# Allegro board stm32f103c8t6.brd
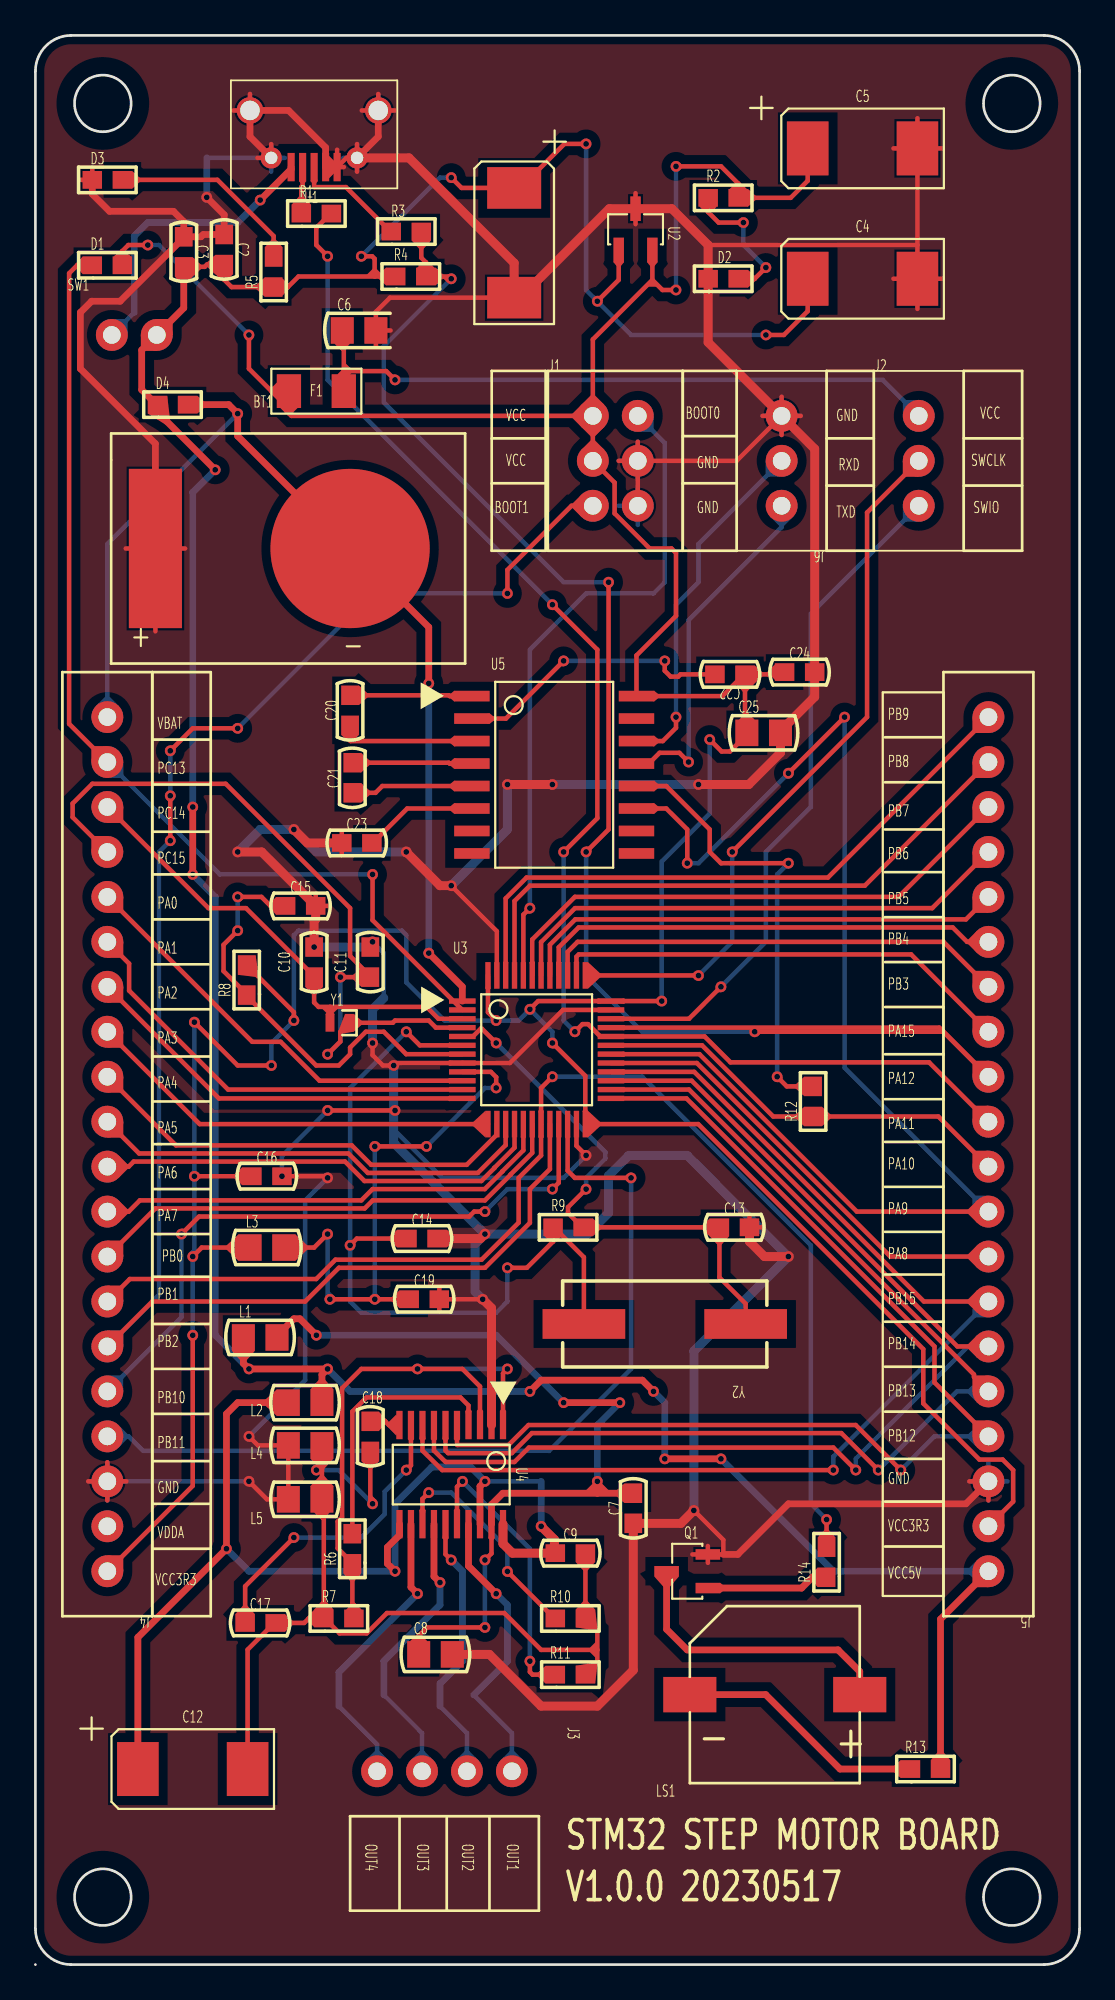
[diagram p0: board, top side]
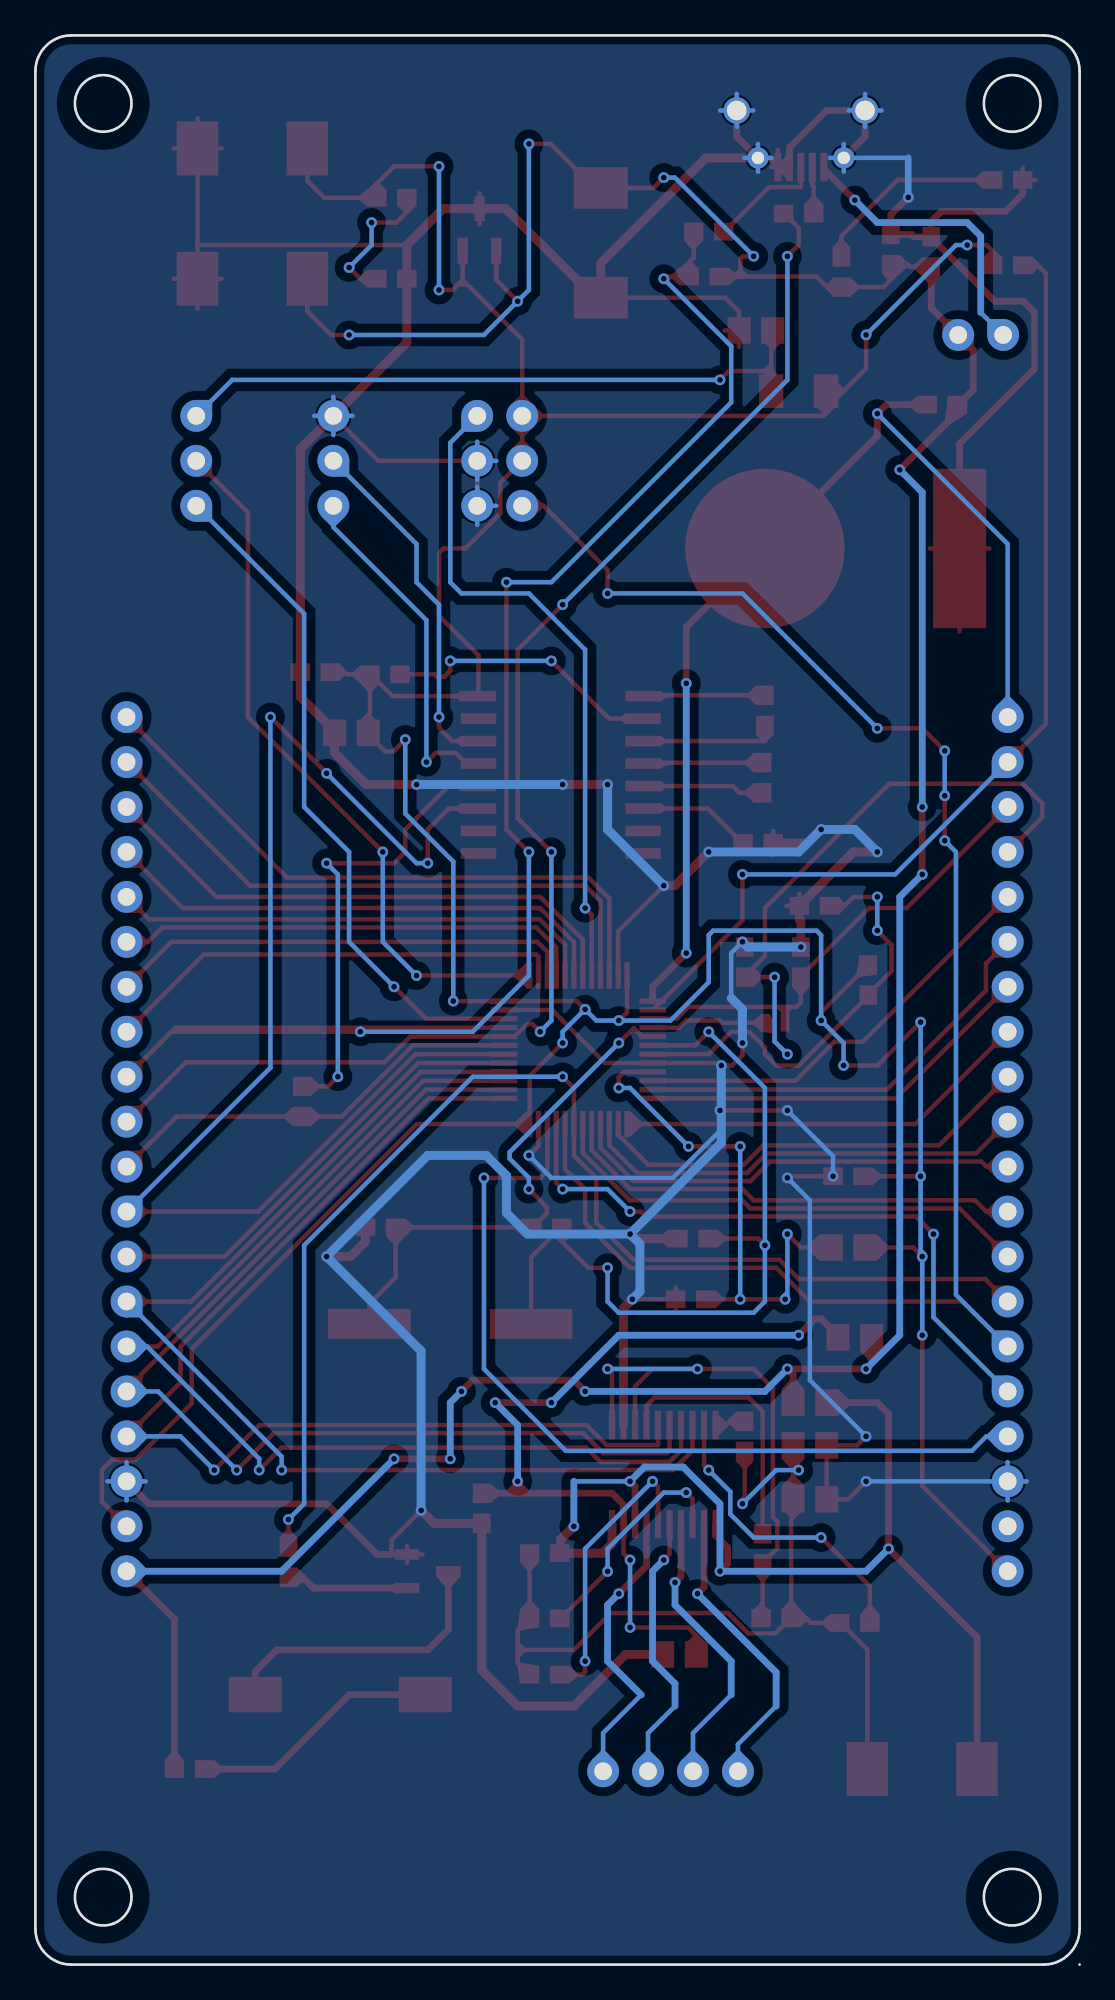
[diagram p1: board, bottom side, seen from below]

Outline 59 x 109 mm; copper layers: TOP, BOTTOM. Coordinates in mm from the lower left corner of the outline.
Outline path: circle c3.81,105.16 r1.6 ; circle c3.81,3.81 r1.6 ; circle c55.17,105.16 r1.6 ; circle c55.17,3.81 r1.6 ; 0,106.97 arc(0.6,108.4) 2.03,109 56.97,109 arc(58.4,108.4) 59,106.97 59,2.03 arc(58.4,0.6) 56.97,0 2.03,0 arc(0.6,0.6) 0,2.03 0,106.97

## Placement (name value [footprint] x y rotation side)
BT1  3.6V  [BAT_9]  17.78 80.01 0 top
C1  100uf/16V  [C7343]  27.05 97.28 270 top
C2  0.1uf/16V  [C0603]  10.67 96.9 270 top
C3  0.1uf/16V  [C0603]  8.38 96.77 270 top
C4  10uf/16V  [C7343]  46.74 95.25 0 top
C5  10uf/16V  [C7343]  46.74 102.62 0 top
C6  10uf/16V  [C0805]  18.29 92.33 0 top
C7  0.1uf/16V  [C0603]  33.78 25.78 90 top
C8  10uf/16V  [C0805]  22.61 17.53 0 top
C9  0.1uf/16V  [C0603]  30.23 23.25 0 top
C10  20pF  [C0603]  15.75 56.64 90 top
C11  20pF  [C0603]  18.92 56.64 90 top
C12  100uf/16V  [C7343]  8.89 11.05 0 top
C13  20pF  [C0603]  39.5 41.66 0 top
C14  20pF  [C0603]  21.84 41.02 0 top
C15  1uf/16V  [C0603]  14.99 59.82 0 top
C16  0.1uf/16V  [C0603]  13.08 44.54 0 top
C17  0.1uf/16V  [C0603]  12.7 19.3 0 top
C18  0.1uf/16V  [C0603]  18.92 29.84 270 top
C19  0.1uf/16V  [C0603]  21.97 37.59 0 top
C20  0.1uf/16V  [C0603]  17.78 70.87 90 top
C21  0.1uf/16V  [C0603]  17.91 67.06 90 top
C22  0.1uf/16V  [C0603]  39.24 72.9 180 top
C23  0.1uf/16V  [C0603]  18.16 63.37 0 top
C24  0.1uf/16V  [C0603]  43.18 73.03 0 top
C25  10uf/16V  [C0805]  41.15 69.6 0 top
D1  SSL-LX4673  [L0603]  4.06 96.01 0 top
D2  SSL-LX4673  [L0603]  38.86 95.25 0 top
D3  SSL-LX4673  [L0603]  4.06 100.84 0 top
D4  IN4148  [L0603]  7.75 88.14 0 top
F1  FUSE  [F1206]  15.88 88.9 0 top
J1  CON6A  [CON2R0_2X3]  34.04 84.96 0 top
J2  CON3  [CON2R0_3P]  49.91 84.96 0 top
J3  CON4  [CON2R0_4P]  21.84 10.92 270 top
J4  HEADER 20  [CON2R0_20P]  4.06 22.23 180 top
J5  HEADER 20  [CON2R0_20P_0]  53.85 22.23 180 top
J6  CON3  [CON2R0_3P]  42.16 84.96 180 top
L1  10@100MHZ  [L0805]  12.7 35.43 0 top
L2  10@100MHZ  [L0805]  15.24 31.75 0 top
L3  2.2uH  [L0805]  13.08 40.51 0 top
L4  10@100MHZ  [L0805]  15.24 29.34 0 top
L5  10@100MHZ  [L0805]  15.24 26.29 0 top
LS1  BEEP  [SPEAKER_3MM]  41.78 15.25 0 top
Q1  2N2222  [SOT23-3]  36.83 22.23 0 top
R1  20  [R0603]  15.88 98.93 0 top
R2  51  [R0603]  38.86 99.82 0 top
R3  20  [R0603]  20.96 97.92 0 top
R4  4.7k  [R0603]  21.21 95.38 0 top
R5  20  [R0603]  13.46 95.63 90 top
R6  1k  [R0603]  17.91 23.5 90 top
R7  1k  [R0603]  17.15 19.56 0 top
R8  10K  [R0603]  11.94 55.63 90 top
R9  1M  [R0603]  30.1 41.66 0 top
R10  1  [R0603]  30.23 19.56 0 top
R11  1  [R0603]  30.23 16.38 0 top
R12  0  [R0603]  43.94 48.77 90 top
R13  100  [R0603]  50.29 11.05 0 top
R14  1k  [R0603]  44.7 22.73 90 top
SW1  SW MAG-SPST/SM  [SW]  4.32 92.08 0 top
U1  USB_mrico  [MICRO_5PIN]  15.75 103.76 0 top
U2  AMS1117-3_3  [SOT23-3]  33.91 98.04 270 top
U3  STM32F103C8T6  [LQFP48]  28.32 51.69 0 top
U4  LB1940T  [TSSOP20]  23.5 27.69 270 top
U5  MAX3232  [SOP16]  29.31 67.22 0 top
Y1  32.768Khz  [YSX1610]  17.15 53.21 0 top
Y2  8Mhz  [HC-49SMD]  35.56 36.2 180 top

## Library data of the parts
BT1 = BATTERY
C1 C4 C5 C12 = CAP POL
C2 C3 C6-C11 C13-C25 = CAP NP
D1-D3 = SSL-LX4673_1
D4 = BAS21/SOT_0
F1 = FUSE
J1 = CON6A
J2 J6 = CON3
J3 = CON4
J4 J5 = HEADER 20
L1-L5 = INDUCTOR
LS1 = SPEAKER
Q1 = 2N2222_0
R1-R14 = R
SW1 = SW MAG-SPST/SM
U1 = USB_mrico_1
U2 = AMS1117-3_3
U3 = STM32F103C8T6
U4 = LB1940T
U5 = MAX3232
Y1 Y2 = ZTB

## Footprints (pads in the part's own frame, mm; a bottom-side part is the same pattern mirrored in y, then rotated)
BAT_9
  round 9 smd: 1(0,0)
  rect 3x9 smd: 2(-11,0)
C0603
  rect 1.1x1 smd: 1(-0.85,0) 2(0.85,0)
C0805
  rect 1.3x1.5 smd: 1(-0.95,0) 2(0.95,0)
C7343
  rect 2.35x3.05 smd: 1(-3.1,0) 2(3.1,0)
CON2R0_2X3
  round 1.8 hole 1: 1(-2.54,2.54) 2(-2.54,0) 3(-2.54,-2.54) 4(0,2.54) 5(0,0) 6(0,-2.54)
CON2R0_3P
  round 1.8 hole 1: 1(0,2.54) 2(0,0) 3(0,-2.54)
CON2R0_4P
  round 1.8 hole 1: 1(0,5.08) 2(0,2.54) 3(0,0) 4(0,-2.54)
CON2R0_20P
  round 1.8 hole 1: 1(0,0) 2(0,-2.54) 3(0,-5.08) 4(0,-7.62) 5(0,-10.16) 6(0,-12.7) 7(0,-15.24) 8(0,-17.78) 9(0,-20.32) 10(0,-22.86) 11(0,-25.4) 12(0,-27.94) 13(0,-30.48) 14(0,-33.02) 15(0,-35.56) 16(0,-38.1) 17(0,-40.64) 18(0,-43.18) 19(0,-45.72) 20(0,-48.26)
CON2R0_20P_0
  round 1.8 hole 1: 1(0,0) 2(0,-2.54) 3(0,-5.08) 4(0,-7.62) 5(0,-10.16) 6(0,-12.7) 7(0,-15.24) 8(0,-17.78) 9(0,-20.32) 10(0,-22.86) 11(0,-25.4) 12(0,-27.94) 13(0,-30.48) 14(0,-33.02) 15(0,-35.56) 16(0,-38.1) 17(0,-40.64) 18(0,-43.18) 19(0,-45.72) 20(0,-48.26)
F1206
  rect 1.372x1.905 smd: 1(-1.55,0) 2(1.55,0)
HC-49SMD
  rect 4.67x1.68 smd: 1(-4.57,0) 2(4.57,0)
L0603
  rect 1.1x1 smd: 1(-0.85,0) 2(0.85,0)
L0805
  rect 1.3x1.5 smd: 1(-0.95,0) 2(0.95,0)
LQFP48
  rect 1.5x0.3 smd: 1(-4.2,2.75) 2(-4.2,2.25) 3(-4.2,1.75) 4(-4.2,1.25) 5(-4.2,0.75) 6(-4.2,0.25) 7(-4.2,-0.25) 8(-4.2,-0.75) 9(-4.2,-1.25) 10(-4.2,-1.75) 11(-4.2,-2.25) 12(-4.2,-2.75) 25(4.2,-2.75) 26(4.2,-2.25) 27(4.2,-1.75) 28(4.2,-1.25) 29(4.2,-0.75) 30(4.2,-0.25) 31(4.2,0.25) 32(4.2,0.75) 33(4.2,1.25) 34(4.2,1.75) 35(4.2,2.25) 36(4.2,2.75)
  rect 0.3x1.5 smd: 13(-2.75,-4.2) 14(-2.25,-4.2) 15(-1.75,-4.2) 16(-1.25,-4.2) 17(-0.75,-4.2) 18(-0.25,-4.2) 19(0.25,-4.2) 20(0.75,-4.2) 21(1.25,-4.2) 22(1.75,-4.2) 23(2.25,-4.2) 24(2.75,-4.2) 37(2.75,4.2) 38(2.25,4.2) 39(1.75,4.2) 40(1.25,4.2) 41(0.75,4.2) 42(0.25,4.2) 43(-0.25,4.2) 44(-0.75,4.2) 45(-1.25,4.2) 46(-1.75,4.2) 47(-2.25,4.2) 48(-2.75,4.2)
MICRO_5PIN
  rect 0.4x1.6 smd: 1(-1.3,-2.2) 2(-0.65,-2.2) 3(0,-2.2) 4(0.65,-2.2) 5(1.3,-2.2)
  round 1.2 hole 0.7: 6(-2.425,-1.68) 7(2.425,-1.68)
  round 1.5 hole 1.1: 8(-3.625,1) 9(3.625,1)
R0603
  rect 1.1x1 smd: 1(-0.85,0) 2(0.85,0)
SOP16
  rect 2x0.6 smd: 1(-4.65,4.445) 2(-4.65,3.175) 3(-4.65,1.905) 4(-4.65,0.635) 5(-4.65,-0.635) 6(-4.65,-1.905) 7(-4.65,-3.175) 8(-4.65,-4.445) 9(4.65,-4.445) 10(4.65,-3.175) 11(4.65,-1.905) 12(4.65,-0.635) 13(4.65,0.635) 14(4.65,1.905) 15(4.65,3.175) 16(4.65,4.445)
SOT23-3
  rect 1.39x0.59 smd: 1(1.165,-0.95) 2(1.165,0.95) 3(-1.165,0)
SPEAKER_3MM
  rect 3x2 smd: 1(-4.8,0) 2(4.8,0)
SW
  round 1.8 hole 1: 1(0,0) 2(2.54,0)
TSSOP20
  rect 1.6x0.35 smd: 1(-2.8,2.925) 2(-2.8,2.275) 3(-2.8,1.625) 4(-2.8,0.975) 5(-2.8,0.325) 6(-2.8,-0.325) 7(-2.8,-0.975) 8(-2.8,-1.625) 9(-2.8,-2.275) 10(-2.8,-2.925) 11(2.8,-2.925) 12(2.8,-2.275) 13(2.8,-1.625) 14(2.8,-0.975) 15(2.8,-0.325) 16(2.8,0.325) 17(2.8,0.975) 18(2.8,1.625) 19(2.8,2.275) 20(2.8,2.925)
YSX1610
  rect 0.5x1 smd: 1(-0.5,0) 2(0.6,0)

## Nets
GND: U5.15
GND_EARTH: C9.2 C12.2 C17.2 C18.2 L4.2 L5.2 R7.1 R10.2 R11.2
GND_POWER: BT1.2(-) C1.2 C2.1 C3.1 C4.2 C5.2 C6.2 C7.1 C8.2 C10.2 C11.2 C13.2 C14.2 C15.2 C16.2 C19.2 C23.1 C24.2 C25.2 D2.1(CATHODE) D3.1(CATHODE) J1.5 J1.6 J4.3 J5.3 J6.3 L4.1 L5.1 Q1.2(EMITTER) U1.4(ID) U1.5(G#5) U1.6(G#6) U1.7(G#7) U1.8(G#8) U1.9(G#9) U2.3(GND) U3.8(VSSA) U3.23(VSS_1) U3.35(GND) U3.47(VSS_3) U4.2(S-GND)
VBAT: BT1.1(+) D4.2(CATHODE) J4.20 U3.1(VBAT)
VCC3R3: C5.1 C16.1 C22.1 C24.1 C25.1 D1.2(ANODE) F1.1 J1.1 J1.2 J4.1 J5.2 L3.1 R2.2 R8.2 U2.2(OUT) U3.24(VDD_1) U3.36(VAA3V3) U3.48(VDD_3) U5.16(VCC)
VCC5V: C1.1 C2.2 C3.2 C4.1 D4.1(ANODE) J5.1 L1.1 L2.2 R4.1 R5.1 R13.2 SW1.2 U2.1(IN)
VDDA: J4.2
BOOT0: J1.4 U3.44(BOOT0)
PA0: J4.16 U3.10(PA0)
PA1: J4.15 U3.11(PA1)
PA2: J4.14 U3.12(PA2)
PA3: J4.13 U3.13(PA3)
PA4: J4.12 U3.14(PA4)
PA5: J4.11 U3.15(PA5)
PA6: J4.10 U3.16(PA6)
PA7: J4.9 U3.17(PA7)
PA8: J5.8 U3.29(PA8)
PA9/TXD1: J5.9 U3.30(PA9) U5.11(T1IN)
PA10/RXD1: J5.10 R12.1 U3.31(PA10)
PA11: J5.11 R1.2 U3.32(PA11)
PA12: J5.12 R3.2 R4.2 U3.33(PA12)
PA15: J5.13 U3.38(PA15)
PB0: J4.8 U3.18(PB0)
PB1: J4.7 R14.2 U3.19(PB1)
PB2/BOOT1: J1.3 J4.6 U3.20(PB2/BOOT1)
PB3: J5.14 U3.39(PB3)
PB4: J5.15 U3.40(PB4)
PB5: J5.16 U3.41(PB5)
PB6: J5.17 U3.42(PB6)
PB7: J5.18 U3.43(PB7)
PB8: J5.19 U3.45(PB8)
PB9: J5.20 U3.46(PB9)
PB10: J4.5 U3.21(PB10)
PB11: J4.4 U3.22(PB11)
PB12: J5.4 U3.25(PB12) U4.5(ENA1)
PB13: J5.5 U3.26(PB13) U4.6(ENA2)
PB14: J5.6 U3.27(PB14) U4.7(IN1)
PB15: J5.7 U3.28(PB15) U4.8(IN2)
PC13: D1.1(CATHODE) J4.19 U3.2(PC13)
PC14: C10.1 J4.18 U3.3(PC14) Y1.1
PC15: C11.1 J4.17 U3.4(PC15) Y1.2
REST: C15.1 R8.1 U3.7(NRST)
RXD: J6.2 U5.14(T1OUT)
SWCLK: J2.2 U3.37(SWCLK)
SWIO: J2.3 U3.34(SWIO)
TXD: J6.1 U5.13(R1IN)
N00977: R1.1 U1.2(D-)
N00983: R3.1 U1.3(D+)
N01151: D3.2(ANODE) R5.2
N04687: C19.1 L3.2 U3.9(VDDA)
N06253: C6.1 F1.2 J2.1
N07032: C13.1 R9.2 U3.5(OSCIN) Y2.1
N07083: C14.1 R9.1 U3.6(OSCOUT) Y2.2
N14166: C9.1 C12.1 L2.1 U4.11(VS2) U4.18(VDD) U4.20(VS1)
N14239: J3.1 U4.17(OUT1)
N14243: J3.2 U4.15(OUT2)
N14247: J3.3 U4.14(OUT3)
N14326: J3.4 U4.12(OUT4)
N14397: C18.1 U4.10(FC2)
N14420: C17.1 U4.9(FC1)
N14539: R6.1 R7.2 U4.1(VC1) U4.3(VC2)
N14589: R6.2 U4.4(VREF)
N14845: R10.1 U4.13(RFG2)
N14868: R11.1 U4.16(RFG1)
N14949: C7.2 C8.1 L1.2 U4.19(SVDD)
N18940: C23.2 U5.6(V-)
N18980: C22.2 U5.2(V+)
N19411: C21.1 U5.5(C2-)
N19425: C21.2 U5.4(C2+)
N19434: C20.1 U5.3(C1-)
N19446: C20.2 U5.1(C1+)
N19567: R12.2 U5.12(R1OUT)
N21162: LS1.2 Q1.3(COLLECTOR)
N39447: LS1.1 R13.1
N40672: SW1.1 U1.1(BBUS)
N207372: Q1.1(BASE) R14.1
N695410: D2.2(ANODE) R2.1

Pads without a net: U5 7 8 9 10

## Via types
v1: diameter 0.61, hole 0.33, TOP to BOTTOM, 135 vias

## Routing (per net, layer and track width the routed paths; a pad name or vN(x,y) marks a point on that pad's centre or on a via; arc(x,y) is an arc through that point)
GND_EARTH: length 53.5
  TOP w0.254: R11.2 31.75,17.06 31.75,17.78 ; C18.2 18.92,26.16 v1(19.05,26.04) ; 16.19,27.94 L5.2 16.19,25.28 16.3,25.18 R7.1 ; 16.19,27.94 v1(15.88,27.94) ; 16.19,27.94 L4.2 ; 31.75,17.78 31.75,18.88 R10.2 C9.2 ; 31.75,17.78 28.58,17.78 26.49,19.86 19.86,19.86 18.71,18.71 17.19,18.71 16.35,19.56 R7.1 ; R7.1 15.44,19.56 15.19,19.3 C17.2 13.5,19.3 11.99,17.79 C12.2
  BOTTOM w0.254: v1(19.05,26.04) 17.15,27.94 v1(15.88,27.94)
GND_POWER: length 494.6
  TOP w0.254: v1(12.07,27.3) 13.08,26.29 L5.1 L4.1 12.57,29.34 v1(12.07,29.84) ; 48.48,102.62 C5.2 ; C5.2 51.19,102.62 ; C5.2 49.84,97.16 ; C5.2 49.84,104.32 ; 2.49,100.84 D3.1 3.21,101.52 ; U1.5 17.43,101.56 ; U1.5 17.05,102.54 ; U1.5 17.57,102.08 U1.7 ; U1.5 U1.4 ; 12.12,105.69 U1.8 11.2,104.76 ; U1.9 20.3,104.76 ; U1.9 18.45,104.76 ; U1.9 19.37,105.69 ; 2.99,27.3 J4.3 ; J4.3 4.06,26.23 ; J4.3 5.14,27.3 ; J4.3 4.06,28.38 ; v1(16.51,48.26) v1(20.32,48.26) ; J1.5 39.62,84.96 J6.3 ; J1.5 34.04,86.04 ; J1.5 32.96,84.96 ; J1.5 34.04,82.42 ; v1(16.51,44.45) 16.42,44.54 v1(13.93,44.54) ; U3.35 29.81,53.94 26.81,50.94 U3.8 20.38,50.94 v1(20.24,50.8) 19.63,50.8 19.05,51.38 v1(19.05,52.07) ; 53.85,26.23 J5.3 52.77,27.3 ; BT1.2 8.46,80.01 ; BT1.2 5.1,80.01 ; BT1.2 6.78,75.33 ; 13.32,102.86 U1.6 12.55,102.08 ; C6.2 20.07,92.33 ; C6.2 19.24,91.4 ; C6.2 19.24,93.38 20.04,94.18 C1.2 ; J6.3 41.09,87.5 ; J6.3 42.16,88.58 ; J6.3 43.24,87.5 ; J6.3 42.16,86.42 ; C4.2 51.19,95.25 ; C4.2 49.84,97.16 ; C4.2 49.84,93.55 ; C4.2 48.48,95.25 ; 17.31,62.69 C23.1 17.31,64.05 ; 16.56,59.82 C15.2 15.84,60.5 ; 41.08,41.66 C13.2 40.35,42.33 ; v1(31.12,45.72) 30.57,46.26 U3.23 ; U1.7 18.17,102.86 ; U1.7 18.17,101.3 ; 49.84,97.16 38.01,97.16 ; 37.12,23.17 Q1.2 ; Q1.2 38.87,23.17 38.87,24 v1(37.2,25.66) ; Q1.2 38,22.7 ; Q1.2 38,23.65 ; U3.47 26.07,58.38 v1(23.5,60.96) ; 33.91,98.34 U2.3 33.91,100.08 ; 22.82,36.91 C19.2 ; C19.2 v1(25.27,37.59) ; C19.2 22.82,38.27
  TOP w0.381: 38.87,23.17 39.69,23.17 42.55,26.04 52.58,26.04 J5.3 ; U1.7 19.37,103.28 U1.9 ; D3.1 3.21,100.03 4.19,99.06 7.8,99.06 8.38,98.48 C3.1 ; C3.1 8.38,97.57 4.79,93.98 3.18,93.98 2.54,93.34 2.54,90.17 6.78,85.93 BT1.2 ; C3.1 9.36,97.62 9.49,97.75 C2.1 10.67,98.86 v1(9.68,99.85) ; U1.6 12.12,103.28 U1.8 14.3,104.76 16.4,102.66 U1.4
  TOP w0.508: v1(37.2,25.66) 36.47,24.93 C7.1 33.78,16.64 31.75,14.61 28.58,14.61 25.65,17.53 C8.2 ; v1(11.43,62.87) 12.79,62.87 C15.2 15.84,59.06 15.75,58.97 v1(15.75,57.49) ; v1(37.47,66.67) 40.31,66.67 42.1,68.46 C25.2 42.1,69.7 44.03,71.63 C24.2 44.03,85.64 J6.3 38.01,91.65 D2.1 38.01,97.16 35.96,99.21 U2.3 32.43,99.21 27.4,94.18 C1.2 27.05,96.14 21.11,102.08 U1.7 ; v1(20.96,62.87) 22.86,60.96 v1(23.5,60.96) ; v1(25.27,37.59) 25.77,37.09 U4.2 ; C13.2 40.35,40.85 41.19,40.01 v1(42.55,40.01) ; C23.1 15.37,63.37 v1(14.61,64.14) ; C14.2 25.15,41.02 v1(25.4,41.27) ; v1(29.21,66.67) v1(26.67,66.67)
  BOTTOM w0.254: 19.69,54.61 19.69,57.15 v1(19.05,57.78) ; J6.3 43.24,87.5 ; J6.3 41.09,87.5 ; J6.3 42.16,86.42 ; J6.3 42.16,88.58 ; 4.06,26.23 J4.3 ; J4.3 v1(12.07,27.3) ; J4.3 4.06,28.38 ; J4.3 2.99,27.3 ; v1(20.24,50.8) 20.32,50.72 v1(20.32,48.26) 20.32,47.11 22.98,44.45 29.85,44.45 v1(31.12,45.72) ; 34.04,81.34 34.04,82.42 ; 34.04,82.42 34.04,83.5 ; 34.04,82.42 32.96,82.42 ; 9.68,102.08 U1.6 ; U1.6 13.32,101.3 ; U1.6 13.32,102.86 ; U1.6 14.1,102.08 ; U1.9 19.37,105.69 ; U1.9 20.3,104.76 ; U1.9 19.37,103.83 ; U1.9 18.45,104.76 ; v1(16.51,44.45) 15.24,43.18 15.24,33.02 v1(12.07,29.84) ; U1.8 13.05,104.76 ; U1.8 12.12,105.69 ; U1.8 12.12,103.83 ; U1.8 11.2,104.76 ; 17.4,102.08 U1.7 ; U1.7 18.17,101.3 ; U1.7 18.95,102.08 ; U1.7 18.17,102.86 ; 52.77,27.3 J5.3 ; J5.3 53.85,28.38 ; J5.3 54.93,27.3 ; J5.3 53.85,26.23 ; 34.04,83.88 J1.5 ; J1.5 34.04,86.04 ; J1.5 32.96,84.96 ; v1(16.51,48.26) 13.93,45.68 v1(13.93,44.54)
  BOTTOM w0.381: v1(9.68,99.85) 9.68,102.08
  BOTTOM w0.508: v1(37.47,66.67) v1(29.21,66.67) ; v1(37.2,25.66) 37.2,34.66 v1(42.55,40.01) 36.83,45.72 33.53,45.72 32.39,44.58 32.39,42.47 31.19,41.27 v1(25.4,41.27) ; v1(20.96,62.87) 15.88,62.87 v1(14.61,64.14) 12.7,64.14 v1(11.43,62.87) ; v1(19.05,52.07) 19.05,53.98 19.69,54.61 ; v1(20.24,50.8) 20.24,46.43 v1(25.4,41.27) ; v1(19.05,57.78) 18.76,57.49 v1(15.75,57.49) ; v1(25.27,37.59) 24.84,38.02 24.84,40.72 v1(25.4,41.27) ; v1(26.67,66.67) 26.67,64.14 v1(23.5,60.96)
VBAT: length 61.7
  TOP w0.381: v1(22.23,57.15) 24.12,55.25 U3.1 ; D4.2 10.92,88.14 v1(11.43,87.63) 11.43,86.36 BT1.1 22.23,75.56 v1(22.23,72.39)
  BOTTOM w0.254: J4.20 4.06,80.26 v1(11.43,87.63)
  BOTTOM w0.381: v1(22.23,57.15) v1(22.23,72.39)
VCC3R3: length 244.7
  TOP w0.254: C16.1 v1(8.98,44.54) ; v1(13.34,50.8) 11.43,50.8 v1(8.98,53.25) ; 34.86,95.18 31.5,91.82 J1.1 ; 34.86,95.18 35.43,94.61 v1(36.2,94.61) ; 34.86,95.18 U2.2 ; v1(8.89,40.01) 9.4,40.51 L3.1 ; J1.1 14.47,87.5 14.33,87.64 F1.1 13.33,88.9 12.07,90.17 v1(12.07,92.08) ; J1.1 J1.2 32.73,83.73 32.73,81.99 34.71,80.01 35.94,80.01 36.2,79.76 36.2,76.2 33.96,73.97 U5.16 38.82,71.67 40.04,72.9 C22.1 ; R8.2 14.61,53.81 v1(14.61,53.34) ; v1(27.94,53.98) 28.4,54.44 U3.36 v1(35.39,54.44) ; J4.1 8.89,27.05 v1(8.89,35.56) ; U3.48 25.57,53.8 v1(26.04,53.34) ; J5.2 55.25,26.16 55.25,27.94 54.65,28.54 53.34,28.54 50.17,31.71 50.17,34.77 37.45,47.49 U3.24 31.07,50.21 v1(29.21,52.07) ; C22.1 41.4,72.9 41.53,73.03 C24.1 ; C22.1 40.09,70.71 40.2,70.6 C25.1 40.2,69.5 39.24,68.54 38.77,68.54 v1(38.1,69.22) ; D1.2 4.91,96.82 5.25,97.16 v1(6.35,97.16) ; C5.1 43.64,100.79 42.67,99.82 R2.2 39.71,100.63 38.74,101.6 v1(36.2,101.6)
  BOTTOM w0.254: v1(8.98,53.25) v1(8.98,44.54) 8.98,40.1 v1(8.89,40.01) v1(8.89,35.56) ; v1(29.21,52.07) 29.21,52.7 v1(27.94,53.98) 27.31,53.34 v1(26.04,53.34) 23.11,53.34 20.96,55.5 20.96,58.17 20.7,58.42 14.86,58.42 14.61,58.17 v1(14.61,53.34) 13.34,52.07 v1(13.34,50.8) ; v1(36.2,101.6) v1(36.2,94.61) ; v1(12.07,92.08) 6.99,97.16 v1(6.35,97.16) ; v1(35.39,54.44) 35.39,62.32 38.1,65.03 v1(38.1,69.22)
VCC5V: length 190.5
  TOP w0.254: C3.2 9.56,95.92 9.69,96.05 C2.2 10.67,95.2 11.08,94.78 R5.1 14.27,94.78 14.86,95.38 19.17,95.38 ; v1(23.5,100.97) 24.08,100.38 C1.1 27.4,100.38 29.89,102.87 v1(31.12,102.87) ; 19.17,95.38 19.17,96.38 19.03,96.52 v1(18.42,96.52) ; 19.17,95.38 R4.1 ; U2.1 32.96,95.19 v1(31.75,93.98) ; C4.1 43.64,93.42 42.29,92.08 v1(41.28,92.08)
  TOP w0.381: R13.2 51.14,19.52 J5.1 ; v1(27.94,32.38) 28.58,33.02 34.29,33.02 v1(34.93,32.38) ; C3.2 8.38,93.6 SW1.2 6.01,91.22 6.01,88.98 6.85,88.14 D4.1 6.9,87.72 v1(10.16,84.45) ; v1(8.89,61.59) v1(8.89,65.41) ; L2.2 16.19,33.33 v1(16.51,33.66) v1(12.07,33.66) 11.75,33.97 L1.1 ; v1(38.74,28.57) v1(35.56,28.57)
  BOTTOM w0.254: v1(41.28,92.08) 33.66,92.08 v1(31.75,93.98) 31.12,94.61 v1(31.12,102.87) ; v1(23.5,100.97) 22.86,100.97 v1(18.42,96.52)
  BOTTOM w0.381: v1(8.89,61.59) 10.16,60.33 10.16,35.56 v1(12.07,33.66) ; v1(8.89,65.41) 8.89,83.19 v1(10.16,84.45) ; v1(35.56,28.57) 35.56,31.75 v1(34.93,32.38) ; v1(16.51,33.66) 17.78,32.38 v1(27.94,32.38) ; v1(38.74,28.57) 45.09,22.23 J5.1
BOOT0: length 37.8
  TOP w0.254: v1(27.94,59.69) 27.57,59.32 U3.44
  BOTTOM w0.254: v1(27.94,59.69) 27.94,74.3 31.12,77.47 34.93,77.47 35.56,78.11 35.56,85.98 J1.4
PA0: length 24.4
  TOP w0.254: J4.16 12.25,52.14 13.86,52.14 16.06,49.94 U3.10
PA1: length 24.4
  TOP w0.254: U3.11 10.89,49.44 5.29,55.03 5.29,56.55 4.06,57.78
PA2: length 22.7
  TOP w0.254: U3.12 10.37,48.94 4.06,55.24
PA3: length 23.7
  TOP w0.254: J4.13 9.28,47.49 U3.13
PA4: length 25.4
  TOP w0.254: 4.06,50.16 7.94,46.29 17.87,46.29 18.97,45.19 24.37,45.19 26.07,46.89 U3.14
PA5: length 25.5
  TOP w0.254: U3.15 26.57,46.3 25,44.73 18.78,44.73 17.68,45.83 5.86,45.83 J4.11
PA6: length 25.7
  TOP w0.254: J4.10 5.27,45.09 5.56,45.37 17.49,45.37 18.59,44.27 25.2,44.27 25.93,45.01 25.93,45.02 27.07,46.16 U3.16
PA7: length 26.4
  TOP w0.254: J4.9 5.27,42.55 5.9,43.18 18.42,43.18 19.05,43.81 25.39,43.81 26.39,44.82 26.39,44.83 27.57,46.01 U3.17
PA8: length 25.9
  TOP w0.254: J5.8 48.31,40.01 37.37,50.94 U3.29
PA9/TXD1: length 73.9
  TOP w0.254: J5.9 46.41,42.55 37.52,51.44 U3.30 ; v1(42.55,67.31) v1(45.72,70.48) ; v1(36.83,62.23) 36.83,64.14 35.65,65.32 U5.11
  BOTTOM w0.254: J5.9 45.72,50.67 v1(45.72,70.48) ; v1(36.83,62.23) 37.47,62.23 v1(42.55,67.31)
PA10/RXD1: length 24.2
  TOP w0.254: J5.10 51.02,47.92 R12.1 41.69,47.92 37.67,51.94 U3.31
PA11: length 80.1
  TOP w0.254: J5.11 50.5,50.98 39.27,50.98 37.81,52.44 U3.32 31.92,52.44 31.22,53.14 30.91,53.14 v1(30.48,52.7) ; v1(29.85,62.87) 31.75,64.77 31.75,74.3 v1(29.21,76.83) ; v1(16.51,96.52) 15.87,97.16 15.87,98.13 16.68,98.93 R1.2
  BOTTOM w0.254: v1(29.85,62.87) 29.85,53.34 v1(30.48,52.7) ; v1(29.21,76.83) 16.51,89.53 v1(16.51,96.52)
PA12: length 99.9
  TOP w0.254: U3.33 51.07,52.94 53.85,50.16 51.31,52.7 v1(40.64,52.7) ; v1(32.39,78.11) 32.39,64.14 v1(31.12,62.87) ; R3.2 21.81,96.44 22.06,96.18 R4.2 23.37,95.38 v1(23.5,95.25)
  BOTTOM w0.254: v1(23.5,95.25) 19.69,91.44 19.69,88.27 29.85,78.11 v1(32.39,78.11) ; v1(40.64,52.7) 34.29,52.7 31.12,55.88 v1(31.12,62.87)
PA15: length 26.2
  TOP w0.254: J5.13 49.48,57.07 30.7,57.07 30.57,56.94 U3.38
PB0: length 28.1
  TOP w0.254: U3.18 28.07,45.86 26.85,44.64 26.85,44.63 25.4,43.18 19.06,43.18 18.61,42.72 6.78,42.72 J4.8
PB1: length 70.1
  TOP w0.254: R14.2 v1(44.7,25.15) ; J4.7 5.33,38.73 15.86,38.73 16.96,39.83 25.21,39.83 27.31,41.92 27.31,44.45 28.57,45.72 U3.19 28.57,49.53 v1(29.21,50.16)
  BOTTOM w0.254: v1(44.7,25.15) 43.82,26.04 43.82,40.64 34.29,50.16 v1(29.21,50.16)
PB2/BOOT1: length 98.3
  TOP w0.254: v1(11.43,69.85) 8.89,69.85 v1(7.62,68.58) ; v1(26.67,77.47) 26.67,78.8 30.29,82.42 31.5,82.42 ; v1(7.62,66.04) v1(7.62,63.5) ; U3.20 29.07,44.95 27.94,43.81 27.94,41.91 25.4,39.37 17.15,39.37 15.24,37.47 6.6,37.47 J4.6
  BOTTOM w0.254: J4.6 6.99,37.85 6.99,62.87 v1(7.62,63.5) ; v1(11.43,69.85) 19.05,77.47 v1(26.67,77.47) ; v1(7.62,68.58) v1(7.62,66.04)
PB3: length 26.4
  TOP w0.254: U3.39 30.07,57.22 30.64,57.78 51.31,57.78 53.85,55.24
PB4: length 26.7
  TOP w0.254: U3.40 29.57,57.48 30.69,58.6 51.83,58.6 52.64,57.78 53.85,57.78
PB5: length 27.6
  TOP w0.254: U3.41 29.07,57.62 30.5,59.05 52.58,59.05 J5.16
PB6: length 29.3
  TOP w0.254: J5.17 50.67,59.69 30.49,59.69 28.57,57.77 U3.42
PB7: length 30.9
  TOP w0.254: U3.43 28.07,57.92 30.48,60.33 48.77,60.33 J5.18
PB8: length 34.2
  TOP w0.254: J5.19 46.86,60.96 27.94,60.96 27.07,60.09 U3.45
PB9: length 35.9
  TOP w0.254: J5.20 44.78,61.42 27.75,61.42 26.57,60.24 U3.46
PB10: length 36.5
  TOP w0.254: v1(25.4,42.55) 24.79,42.55 24.51,42.27 9.25,42.27 v1(8.26,41.27) ; v1(29.21,43.81) 29.57,44.18 U3.21
  BOTTOM w0.254: v1(8.26,41.27) 8.26,36.58 4.06,32.38 ; v1(29.21,43.81) 26.67,43.81 v1(25.4,42.55)
PB11: length 49
  TOP w0.254: U3.22 30.07,44.86 30.48,44.45 v1(33.66,44.45)
  BOTTOM w0.254: v1(33.66,44.45) 33.66,33.66 29.03,29.03 6.09,29.03 5.27,29.84 4.06,29.84
PB12: length 63.9
  TOP w0.254: U4.5 23.82,29.38 23.85,29.36 26.73,29.36 27.86,30.49 46.35,30.49 v1(48.9,27.94) ; 53.85,29.84 50.8,32.89 50.8,34.92 36.79,48.94 U3.25
  BOTTOM w0.254: 53.85,29.84 50.8,29.84 v1(48.9,27.94)
PB13: length 63.8
  TOP w0.254: U4.6 23.17,29.05 23.32,28.9 26.92,28.9 28.05,30.03 45.54,30.03 v1(47.63,27.94) ; 53.85,32.38 53.03,33.2 53.03,33.34 36.93,49.44 U3.26
  BOTTOM w0.254: v1(47.63,27.94) 52.07,32.38 53.85,32.38
PB14: length 64.7
  TOP w0.254: U4.7 22.52,29.04 23.18,28.4 27.07,28.4 27.88,29.21 45.09,29.21 v1(46.36,27.94) ; U3.27 37.08,49.94 52.09,34.92 J5.6
  BOTTOM w0.254: J5.6 52.69,34.92 46.36,28.59 v1(46.36,27.94)
PB15: length 65
  TOP w0.254: J5.7 50.2,37.47 37.23,50.44 U3.28 ; v1(45.09,27.94) 22.99,27.94 21.87,29.04 U4.8
  BOTTOM w0.254: v1(45.09,27.94) 45.09,28.7 J5.7
PC13: length 57.4
  TOP w0.254: v1(19.05,61.59) 19.05,59.01 U3.2 ; J4.19 1.91,70.1 1.91,95.56 2.36,96.01 D1.1
  BOTTOM w0.254: v1(19.05,61.59) 10.42,61.59 4.07,67.94 J4.19
PC14: length 26.8
  TOP w0.254: U3.3 22.77,53.44 22.1,54.11 16.65,54.11 ; 16.65,54.11 16,54.11 15.75,54.36 C10.1 15.75,55.84 11.9,59.69 9.78,59.69 J4.18 ; 16.65,54.11 Y1.1
PC15: length 42.2
  TOP w0.254: v1(17.23,55.79) C11.1 18.92,55.84 17.78,56.99 17.78,59.69 10.76,66.71 3.22,66.71 2.1,65.6 2.1,64.83 J4.17 ; U3.4 22.63,52.94 22.23,53.34 20.32,53.34 20.19,53.21 Y1.2 17.23,52.69 17.23,52.15 v1(16.51,51.44)
  BOTTOM w0.254: v1(16.51,51.44) 17.23,52.16 v1(17.23,55.79)
REST: length 24.7
  TOP w0.254: U3.7 20.95,51.44 19.69,52.7 18.67,52.7 17.78,51.82 17.78,51.44 17.15,50.8 15.86,50.8 11.94,54.73 R8.1 11.94,54.83 10.63,56.13 10.63,57.62 v1(11.43,58.42) ; C15.1 13.28,59.82 12.77,60.33 v1(11.43,60.33)
  BOTTOM w0.254: v1(11.43,58.42) v1(11.43,60.33)
RXD: length 20.1
  TOP w0.254: v1(36.2,70.48) 36.2,69.88 35.45,69.13 U5.14
  BOTTOM w0.254: J6.2 37.47,80.26 37.47,78.11 36.2,76.83 v1(36.2,70.48)
SWCLK: length 40.6
  TOP w0.254: v1(39.37,62.87) 46.99,70.48 46.99,82.04 J2.2 ; U3.37 37.46,55.89 v1(37.47,55.88)
  BOTTOM w0.254: v1(39.37,62.87) 39.37,57.78 v1(37.47,55.88)
SWIO: length 38.8
  TOP w0.254: v1(38.74,55.24) 36.93,53.44 U3.34
  BOTTOM w0.254: v1(38.74,55.24) 41.28,57.78 41.28,62.87 43.82,65.41 43.82,76.33 49.91,82.42
TXD: length 20.1
  TOP w0.254: v1(36.91,67.94) 36.39,68.46 35.27,68.46 34.66,67.86 U5.13
  BOTTOM w0.254: 42.16,82.42 42.16,81.22 36.91,75.96 v1(36.91,67.94)
N00977: length 2.7
  TOP w0.254: U1.2 15.1,100.51 15.03,100.43 R1.1
N00983: length 6.5
  TOP w0.254: U1.3 15.75,100.45 15.77,100.43 17.54,100.43 20.06,97.92 R3.1
N01151: length 11
  TOP w0.254: D3.2 10.29,100.84 13.46,97.66 R5.2
N04687: length 30.5
  TOP w0.254: C19.1 v1(19.18,37.59) v1(16.64,37.59) ; L3.2 15.75,40.51 v1(16.51,41.27) ; v1(26.04,49.53) 26.04,50.14 25.74,50.44 U3.9 ; v1(19.18,46.23) v1(22.1,46.23)
  BOTTOM w0.254: v1(16.64,37.59) 16.51,37.72 v1(16.51,41.27) ; v1(19.18,37.59) v1(19.18,46.23) ; v1(26.04,49.53) 25.4,49.53 v1(22.1,46.23)
N06253: length 37
  TOP w0.254: 17.43,90.03 17.43,91.24 17.34,91.32 C6.1 ; 17.43,90.03 19.82,90.03 v1(20.32,89.53) ; 17.43,90.03 F1.2
  BOTTOM w0.254: v1(20.32,89.53) 47.88,89.53 J2.1
N07032: length 30.4
  TOP w0.254: U3.5 24.72,52.44 25.18,52.89 25.21,52.89 v1(26.04,52.07) ; Y2.1 40.13,37.34 38.65,38.82 C13.1 R9.2 30.9,41.66 30.09,42.46 30.09,42.79 v1(31.12,43.81)
  BOTTOM w0.254: v1(31.12,43.81) 31.12,44.45 32.21,45.54 32.21,45.9 v1(26.04,52.07)
N07083: length 44.9
  TOP w0.254: U3.6 21.72,51.94 v1(20.96,52.7) ; v1(17.78,40.64) 18.16,41.02 C14.1 ; v1(26.67,39.37) 27.77,39.37 29.25,40.85 R9.1 29.3,41.66 30.99,39.97 Y2.2
  BOTTOM w0.254: v1(20.96,52.7) 17.78,49.53 v1(17.78,40.64) 17.78,37.47 18.42,36.83 26.04,36.83 26.67,37.47 v1(26.67,39.37)
N14166: length 63.5
  TOP w0.254: 29.33,23.25 C9.1
  TOP w0.381: v1(25.4,27.3) 25.12,27.03 U4.18 ; U4.11 20.57,24.26 19.89,23.58 19.89,22.66 v1(20.32,22.23) ; L2.1 11.43,31.75 10.8,31.11 v1(10.8,23.5) 5.79,18.49 C12.1
  TOP w0.508: v1(28.58,24.77) 29.33,24.01 29.33,23.25 26.96,23.25 26.42,23.78 U4.20
  BOTTOM w0.254: 28.58,27.3 v1(25.4,27.3)
  BOTTOM w0.381: v1(10.8,23.5) 12.07,22.23 v1(20.32,22.23) 20.32,26.04 22.4,28.11 24.59,28.11 v1(25.4,27.3) ; v1(28.58,24.77) 28.58,27.3
N14239: length 16.6
  TOP w0.381: v1(26.04,20.95) 24.47,22.52 U4.17
  BOTTOM w0.254: 24.77,15.24 26.92,13.08 J3.1
  BOTTOM w0.381: 24.77,15.24 26.67,17.14 26.67,20.32 v1(26.04,20.95)
N14243: length 15.5
  TOP w0.254: U4.15 23.17,23.19 v1(23.5,22.86)
  BOTTOM w0.254: 22.86,14.61 24.38,13.08 J3.2
  BOTTOM w0.381: v1(23.5,22.86) 24.13,22.23 24.13,17.14 22.86,15.88 22.86,14.61
N14247: length 16.3
  TOP w0.381: U4.14 22.52,21.93 v1(22.86,21.59)
  BOTTOM w0.254: J3.3 21.84,13.08 19.69,15.24
  BOTTOM w0.381: v1(22.86,21.59) 22.86,20.32 19.69,17.14 19.69,15.24
N14326: length 16.9
  TOP w0.381: v1(21.59,20.95) 21.22,21.33 U4.12
  BOTTOM w0.254: 17.15,14.61 19.3,12.45 J3.4
  BOTTOM w0.381: v1(21.59,20.95) 17.15,16.51 17.15,14.61
N14397: length 1.7
  TOP w0.254: C18.1 19.77,30.69 19.97,30.49 U4.10
N14420: length 17.3
  TOP w0.254: C17.1 11.85,21.38 v1(14.61,24.13) ; v1(20.96,27.94) 21.22,28.2 U4.9
  BOTTOM w0.254: v1(20.96,27.94) 19.74,26.72 19.74,25.45 18.42,24.13 v1(14.61,24.13)
N14539: length 32.7
  TOP w0.254: U4.1 26.42,33.41 v1(26.67,33.66) ; U4.3 25.12,32.66 24.13,33.66 v1(21.59,33.66) 18.42,33.66 17.33,32.57 17.33,25.28 17.08,25.03 17.08,23.53 17.91,22.7 R6.1 17.91,20.4 18,20.31 R7.2
  BOTTOM w0.254: v1(26.67,33.66) v1(21.59,33.66)
N14589: length 15.1
  TOP w0.254: U4.4 24.47,31.59 24.02,32.05 18.71,32.05 17.91,31.25 R6.2
N14845: length 12.8
  TOP w0.254: R10.1 29.33,19.56 v1(26.67,22.21) ; U4.13 21.87,26.31 v1(22.23,26.67)
  BOTTOM w0.254: v1(22.23,26.67) 23.5,26.67 26.67,23.5 v1(26.67,22.21)
N14868: length 16.4
  TOP w0.254: U4.16 23.82,27 v1(24.13,27.3) ; R11.1 28.09,16.38 27.94,16.54 v1(27.94,17.14)
  BOTTOM w0.254: v1(24.13,27.3) 27.94,23.5 v1(27.94,17.14)
N14949: length 47.8
  TOP w0.254: C8.1 21.66,18.58 22.13,19.05 v1(25.4,19.05) ; U4.19 25.77,23.23 v1(25.4,22.86)
  TOP w0.381: C7.2 31.75,26.63 ; 31.75,26.63 v1(31.75,27.3) ; 31.75,26.63 26.41,26.63 25.77,25.99 U4.19 ; v1(33.02,31.75) v1(29.85,31.75) ; L1.2 13.65,35.53 14.61,36.49 14.95,36.49 v1(15.88,35.56)
  BOTTOM w0.254: v1(25.4,19.05) v1(25.4,22.86)
  BOTTOM w0.381: v1(31.75,27.3) 31.75,30.48 v1(33.02,31.75) ; v1(15.88,35.56) 26.04,35.56 v1(29.85,31.75)
N18940: length 6.5
  TOP w0.254: U5.6 21.01,65.32 19.06,63.37 C23.2
N18980: length 15.8
  TOP w0.254: v1(35.56,73.66) 35.56,73.1 35.89,72.77 36.32,72.77 36.45,72.9 C22.2 ; v1(29.85,73.66) 26.59,70.4 U5.2
  BOTTOM w0.254: v1(29.85,73.66) v1(35.56,73.66)
N19411: length 6.9
  TOP w0.254: C21.1 19.22,66.21 19.6,66.59 U5.5
N19425: length 6.8
  TOP w0.254: U5.4 23.41,67.86 23.36,67.91 C21.2
N19434: length 7.8
  TOP w0.254: C20.1 17.78,69.16 17.81,69.13 U5.3
N19446: length 6.9
  TOP w0.254: C20.2 23.36,71.72 23.41,71.67 U5.1
N19567: length 25.7
  TOP w0.254: U5.12 35.65,66.59 38.1,64.14 38.1,62.87 38.74,62.23 v1(42.55,62.23) ; R12.2 42.46,49.62 v1(41.91,50.16)
  BOTTOM w0.254: v1(41.91,50.16) 41.91,61.59 v1(42.55,62.23)
N21162: length 16.5
  TOP w0.381: Q1.3 35.67,18.95 36.83,17.78 45.36,17.78 46.58,16.56 LS1.2
N39447: length 14.2
  TOP w0.381: LS1.1 41.26,15.25 45.47,11.05 R13.1
N40672: length 16.7
  TOP w0.381: v1(12.7,99.69) 14.45,101.44 U1.1
  BOTTOM w0.254: 5.59,93.34 SW1.1
  BOTTOM w0.381: 5.59,93.34 5.59,97.66 6.35,98.42 11.43,98.42 v1(12.7,99.69)
N207372: length 7
  TOP w0.381: R14.1 43.9,21.88 43.29,21.28 Q1.1
N695410: length 7.9
  TOP w0.254: D2.2 40.64,95.25 v1(41.28,95.89) ; R2.1 38.01,99.02 38.6,98.42 v1(40.01,98.42)
  BOTTOM w0.254: v1(41.28,95.89) 40.01,97.16 v1(40.01,98.42)

## Copper pours and planes (outline as drawn; the poured copper is in the pictures)
GND_EARTH on TOP (solid shape): 16.11,27.66 16.19,27.69 16.27,27.66 16.84,27.04 16.19,26.26 15.54,27.04
GND_EARTH on TOP (solid shape): 16.84,28.59 16.27,27.97 16.19,27.94 16.11,27.97 15.54,28.59 16.19,29.37
GND_EARTH on TOP (solid shape): 31.62,17.06 31.71,17.02 31.75,16.93 31.63,15.88 31.05,16.36 30.53,16.88
GND_EARTH on TOP (solid shape): 31.75,19.01 31.71,18.92 31.62,18.88 30.53,19.06 31.05,19.58 31.63,20.06
GND_POWER on TOP: 2.03,0.5 0.95,0.95 0.5,2.03 0.5,106.97 0.95,108.05 2.03,108.5 56.97,108.5 58.05,108.05 58.5,106.97 58.5,2.03 58.05,0.95 56.97,0.5 ; 49 cut-outs
GND_POWER on BOTTOM: 2.03,0.5 0.95,0.95 0.5,2.03 0.5,106.97 0.95,108.05 2.03,108.5 56.97,108.5 58.05,108.05 58.5,106.97 58.5,2.03 58.05,0.95 56.97,0.5 ; 15 cut-outs
VCC3R3 on TOP (solid shape): 12.16,40.51 11.48,39.76 10.76,40.43 10.73,40.51 10.76,40.59 11.48,41.26
VCC3R3 on TOP (solid shape): 12.62,55.93 12.58,55.84 12.49,55.8 11.44,55.93 11.92,56.5 12.44,57.03
VCC5V on TOP (solid shape): 12.4,34.68 11.86,34.07 11.75,34.03 11.64,34.07 11.1,34.68 11.75,35.48
VCC5V on TOP (solid shape): 16.08,33.11 16.19,33.15 16.3,33.11 16.84,32.5 16.19,31.7 15.54,32.5
VCC5V on TOP (solid shape): 7.62,87.19 7.53,87.03 7.35,87.01 6.35,87.64 6.87,88.18 7.45,88.64
N04687 on TOP (solid shape): 15.4,40.59 15.43,40.51 15.4,40.43 14.68,39.76 14,40.51 14.68,41.26
N14166 on TOP (solid shape): 14.34,31.75 13.64,31 12.93,31.64 12.89,31.75 12.93,31.86 13.64,32.5
GND_EARTH on TOP (solid shape): 16.62,25.54 16.25,25.18 16.19,25.16 16.13,25.18 15.76,25.54 16.19,26.32
GND_EARTH on TOP (solid shape): 14.58,19.38 14.6,19.3 14.58,19.23 14.1,18.8 13.52,19.3 14.1,19.8
GND_EARTH on TOP (solid shape): 16.22,20.58 16.3,20.61 16.37,20.58 16.85,20.06 16.3,19.53 15.75,20.06
GND_EARTH on TOP (solid shape): 19.42,28.44 19,27.97 18.92,27.95 18.85,27.97 18.42,28.44 18.92,29.03
GND_EARTH on TOP (solid shape): 31,20.58 31.08,20.61 31.15,20.58 31.63,20.06 31.08,19.53 30.53,20.06
GND_EARTH on TOP (solid shape): 31.63,22.75 31.15,22.22 31.08,22.2 31,22.22 30.53,22.75 31.08,23.28
GND_POWER on TOP (solid shape): 17.15,101.63 17.18,101.56 17.15,101.49 16.6,100.93 16.37,101.56 16.6,102.19
GND_POWER on TOP (solid shape): 23.72,41.13 23.74,41.02 23.72,40.91 23.24,40.52 22.63,41.02 23.24,41.52
VBAT on TOP (solid shape): 9.62,88.24 9.65,88.14 9.62,88.04 9.15,87.64 8.55,88.14 9.15,88.64
VBAT on BOTTOM (solid shape): 3.97,71.67 4.06,71.71 4.15,71.67 4.7,71.12 4.06,70.45 3.43,71.12
VCC3R3 on TOP (solid shape): 14.36,88.9 13.64,88.42 13.23,88.83 13.21,88.9 13.23,88.97 13.64,89.38
VCC3R3 on TOP (solid shape): 14.81,87.95 14.39,87.54 14.33,87.52 14.26,87.54 13.84,87.95 14.33,88.93
VCC3R3 on TOP (solid shape): 40.13,70.71 40.2,70.73 40.26,70.71 40.63,70.35 40.2,69.56 39.76,70.35
VCC3R3 on TOP (solid shape): 12.26,44.54 11.68,44.04 11.21,44.47 11.18,44.54 11.21,44.62 11.68,45.04
VCC3R3 on TOP (solid shape): 40.64,72.4 40.17,71.87 40.09,71.85 40.02,71.87 39.54,72.4 40.09,72.93
VCC3R3 on TOP (solid shape): 40.74,99.9 40.76,99.82 40.74,99.75 40.26,99.32 39.68,99.82 40.26,100.32
VCC3R3 on TOP (solid shape): 41.12,72.97 41.14,72.9 41.12,72.82 40.64,72.4 40.06,72.9 40.64,73.4
VCC3R3 on TOP (solid shape): 31.41,88.69 31.5,88.72 31.59,88.69 32.13,88.14 31.5,87.47 30.86,88.14
VCC3R3 on TOP (solid shape): 31.41,86.15 31.5,86.18 31.59,86.15 32.13,85.6 31.5,84.93 30.86,85.6
VCC3R3 on TOP (solid shape): 31.53,87.5 30.86,86.87 30.31,87.41 30.28,87.5 30.31,87.59 30.86,88.14
VCC3R3 on TOP (solid shape): 31.94,47.57 31.97,47.49 31.94,47.41 31.22,46.74 31.04,47.49 31.22,48.24
VCC3R3 on TOP (solid shape): 32.13,86.87 31.59,86.32 31.5,86.28 31.41,86.32 30.86,86.87 31.5,87.53
VCC5V on TOP (solid shape): 8.88,95.37 8.48,94.9 8.38,94.87 8.28,94.9 7.88,95.37 8.38,95.97
VCC5V on TOP (solid shape): 9.41,96 9.43,95.92 9.41,95.85 8.88,95.37 8.35,95.92 8.88,96.47
VCC5V on TOP (solid shape): 10.7,96.05 10.17,95.5 9.65,95.97 9.62,96.05 9.65,96.13 10.17,96.6
VCC5V on TOP (solid shape): 13.49,94.78 12.96,94.23 12.44,94.7 12.41,94.78 12.44,94.86 12.96,95.33
VCC5V on TOP (solid shape): 20.39,95.38 19.81,94.88 19.33,95.3 19.31,95.38 19.33,95.45 19.81,95.88
VCC5V on TOP (solid shape): 51.04,12.07 51.14,12.1 51.25,12.07 51.69,11.55 51.14,11 50.59,11.55
VCC5V on BOTTOM (solid shape): 53.9,22.23 53.21,21.59 52.71,22.09 52.65,22.23 52.71,22.36 53.21,22.86
PA3 on TOP (solid shape): 25.6,47.49 25.42,46.74 24.7,47.41 24.67,47.49 24.7,47.57 25.42,48.24
PA6 on TOP (solid shape): 5.25,45.17 5.28,45.09 5.25,45 4.7,44.45 4.03,45.09 4.7,45.72
PA7 on TOP (solid shape): 5.25,42.63 5.28,42.55 5.25,42.46 4.7,41.91 4.03,42.55 4.7,43.18
PA8 on TOP (solid shape): 53.88,40.01 53.21,39.37 52.67,39.92 52.63,40.01 52.67,40.09 53.21,40.64
PA9/TXD1 on TOP (solid shape): 53.88,42.55 53.21,41.91 52.67,42.46 52.63,42.55 52.67,42.63 53.21,43.18
PA10/RXD1 on TOP (solid shape): 43.97,47.92 43.44,47.37 42.92,47.84 42.89,47.92 42.92,48 43.44,48.47
PA10/RXD1 on TOP (solid shape): 44.97,48 44.99,47.92 44.97,47.84 44.44,47.37 43.91,47.92 44.44,48.47
PA12 on TOP (solid shape): 22.36,97.42 21.88,96.89 21.81,96.87 21.73,96.89 21.26,97.42 21.81,97.95
PA12 on TOP (solid shape): 23.08,95.45 23.11,95.38 23.08,95.3 22.61,94.88 22.03,95.38 22.61,95.88
PB1 on TOP (solid shape): 44.63,24.61 44.7,24.63 44.78,24.61 45.2,24.13 44.7,23.55 44.2,24.13
PB2/BOOT1 on TOP (solid shape): 31.53,82.42 30.86,81.79 30.31,82.33 30.28,82.42 30.31,82.51 30.86,83.06
PB4 on TOP (solid shape): 53.88,57.78 53.21,57.15 52.67,57.7 52.63,57.78 52.67,57.87 53.21,58.42
PB11 on BOTTOM (solid shape): 5.25,29.93 5.28,29.84 5.25,29.76 4.7,29.21 4.03,29.84 4.7,30.48
PB12 on BOTTOM (solid shape): 53.88,29.84 53.21,29.21 52.67,29.76 52.63,29.84 52.67,29.93 53.21,30.48
PB13 on BOTTOM (solid shape): 53.88,32.38 53.21,31.75 52.67,32.3 52.63,32.38 52.67,32.47 53.21,33.02
PB14 on TOP (solid shape): 53.88,34.92 53.21,34.29 52.67,34.84 52.63,34.92 52.67,35.01 53.21,35.56
PB14 on BOTTOM (solid shape): 53.88,34.92 53.21,34.29 52.67,34.84 52.63,34.92 52.67,35.01 53.21,35.56
PB15 on TOP (solid shape): 53.88,37.47 53.21,36.83 52.67,37.38 52.63,37.47 52.67,37.55 53.21,38.1
PC14 on TOP (solid shape): 16.25,55.24 15.82,54.77 15.75,54.74 15.67,54.77 15.25,55.24 15.75,55.82
PC15 on TOP (solid shape): 18.96,55.79 18.42,55.24 17.9,55.71 17.87,55.79 17.9,55.87 18.42,56.34
SWCLK on TOP (solid shape): 31.94,55.97 31.97,55.89 31.94,55.81 31.22,55.14 31.04,55.89 31.22,56.64
TXD on BOTTOM (solid shape): 42.8,81.79 42.25,81.24 42.16,81.2 42.07,81.24 41.53,81.79 42.16,82.45
N00977 on TOP (solid shape): 14.95,99.96 15.03,99.98 15.1,99.96 15.58,99.43 15.03,98.9 14.48,99.43
N01151 on TOP (solid shape): 5.94,100.91 5.96,100.84 5.94,100.76 5.46,100.34 4.88,100.84 5.46,101.34
N01151 on TOP (solid shape): 13.39,97.51 13.46,97.53 13.54,97.51 13.96,97.03 13.46,96.45 12.96,97.03
N04687 on TOP (solid shape): 21.15,37.59 20.57,37.09 20.1,37.52 20.07,37.59 20.1,37.67 20.57,38.09
N06253 on TOP (solid shape): 17.77,91.58 17.4,91.22 17.34,91.2 17.27,91.22 16.9,91.58 17.34,92.36
N07032 on TOP (solid shape): 31.97,41.73 32,41.66 31.97,41.58 31.5,41.16 30.92,41.66 31.5,42.16
N07032 on TOP (solid shape): 38.68,41.66 38.1,41.16 37.62,41.58 37.6,41.66 37.62,41.73 38.1,42.16
N07032 on TOP (solid shape): 39.2,41.16 38.73,40.63 38.65,40.61 38.57,40.63 38.1,41.16 38.65,41.69
N07083 on TOP (solid shape): 21.03,41.02 20.44,40.52 19.97,40.95 19.94,41.02 19.97,41.1 20.44,41.52
N14239 on BOTTOM (solid shape): 26.83,12.11 26.92,12.14 27.01,12.11 27.56,11.56 26.92,10.89 26.29,11.56
N14243 on BOTTOM (solid shape): 24.29,12.11 24.38,12.14 24.47,12.11 25.02,11.56 24.38,10.89 23.75,11.56
N14247 on BOTTOM (solid shape): 21.75,12.11 21.84,12.14 21.93,12.11 22.48,11.56 21.84,10.89 21.21,11.56
N14326 on BOTTOM (solid shape): 19.21,12.11 19.3,12.14 19.39,12.11 19.94,11.56 19.3,10.89 18.67,11.56
N14397 on TOP (solid shape): 19.87,30.76 19.89,30.69 19.87,30.63 19.42,30.17 18.89,30.69 19.42,31.22
N14420 on TOP (solid shape): 11.77,20.33 11.85,20.35 11.93,20.33 12.4,19.8 11.85,19.27 11.3,19.8
N14539 on TOP (solid shape): 18.41,22.09 17.98,21.62 17.91,21.6 17.83,21.62 17.41,22.09 17.91,22.68
N14868 on TOP (solid shape): 29.41,16.38 28.83,15.88 28.35,16.31 28.33,16.38 28.35,16.46 28.83,16.88
N14949 on TOP (solid shape): 21.59,18.69 21.66,18.71 21.72,18.69 22.14,18.28 21.66,17.49 21.17,18.28
N14949 on TOP (solid shape): 33.83,26.63 33.28,26.08 32.76,26.53 32.73,26.63 32.76,26.74 33.28,27.18
N14949 on TOP (solid shape): 31.62,27.3 31.75,27.36 31.89,27.3 32.42,26.77 31.94,26.58 31.56,26.58 31.08,26.77
N19411 on TOP (solid shape): 18.93,66.28 18.96,66.21 18.93,66.13 18.41,65.66 17.88,66.21 18.41,66.76
N19425 on TOP (solid shape): 18.93,67.98 18.96,67.91 18.93,67.83 18.41,67.36 17.88,67.91 18.41,68.46
N19446 on TOP (solid shape): 18.8,71.79 18.83,71.72 18.8,71.64 18.28,71.17 17.75,71.72 18.28,72.27
N19567 on TOP (solid shape): 43.97,49.62 43.44,49.07 42.92,49.54 42.89,49.62 42.92,49.7 43.44,50.17
N21162 on TOP (solid shape): 36.36,21.93 35.78,21.27 35.67,21.24 35.55,21.27 34.97,21.93 35.67,22.27
N39447 on TOP (solid shape): 49.49,11.05 48.89,10.55 48.42,10.95 48.39,11.05 48.42,11.15 48.89,11.55
N207372 on TOP (solid shape): 44.75,21.88 44.2,21.33 43.73,21.79 43.71,21.88 43.73,21.98 44.2,22.43
N695410 on TOP (solid shape): 40.74,95.33 40.76,95.25 40.74,95.17 40.26,94.75 39.68,95.25 40.26,95.75

Small or netless copper shapes (teardrops, artwork), in the pictures only: 200 on TOP, 116 on BOTTOM

## Text on the board
Ref Des/Silkscreen Top: VCC3R3 | VBAT | PC13 | PC14 | PC15 | PA0 | PA1 | PA2 | PA3 | PA4 | PA5 | PA6 | PA7 | PB1 | PB2 | PB10 | PB11 | GND | VDDA | PB0 | BOOT1 | VCC | BOOT0 | TXD | RXD | PB9 | PB8 | PB7 | PB6 | PB5 | PB4 | PB3 | PA15 | PA12 | PA11 | PA10 | PA9 | PA8 | PB15 | PB14 | PB13 | PB12 | VCC5V | SWCLK | SWIO | OUT4 | OUT3 | OUT2 | OUT1 | STM32 STEP MOTOR BOARD | V1.0.0 20230517
NCLEGEND-1-2: FIGURE | SIZE | 13.0 | 27.56 | 39.37 | 43.31 | DRILL CHART: TOP to BOTTOM | ALL UNITS ARE IN MILS | PLATED | QTY | 135 | 2 | 58
